# Altium PCB PCB_AVlabs AV-GMK MK I_2_2024-01-18 (1).pcbdoc (part 3 of 5)
Units mil, origin at the board's own origin, x right, y up, seen from the top; angles counter-clockwise.
Board outline 17777.1 x 9140.8 mil, 2 copper layers (Top Layer, Bottom Layer); 156 components, 279 nets, 1257 pads, 596 vias.
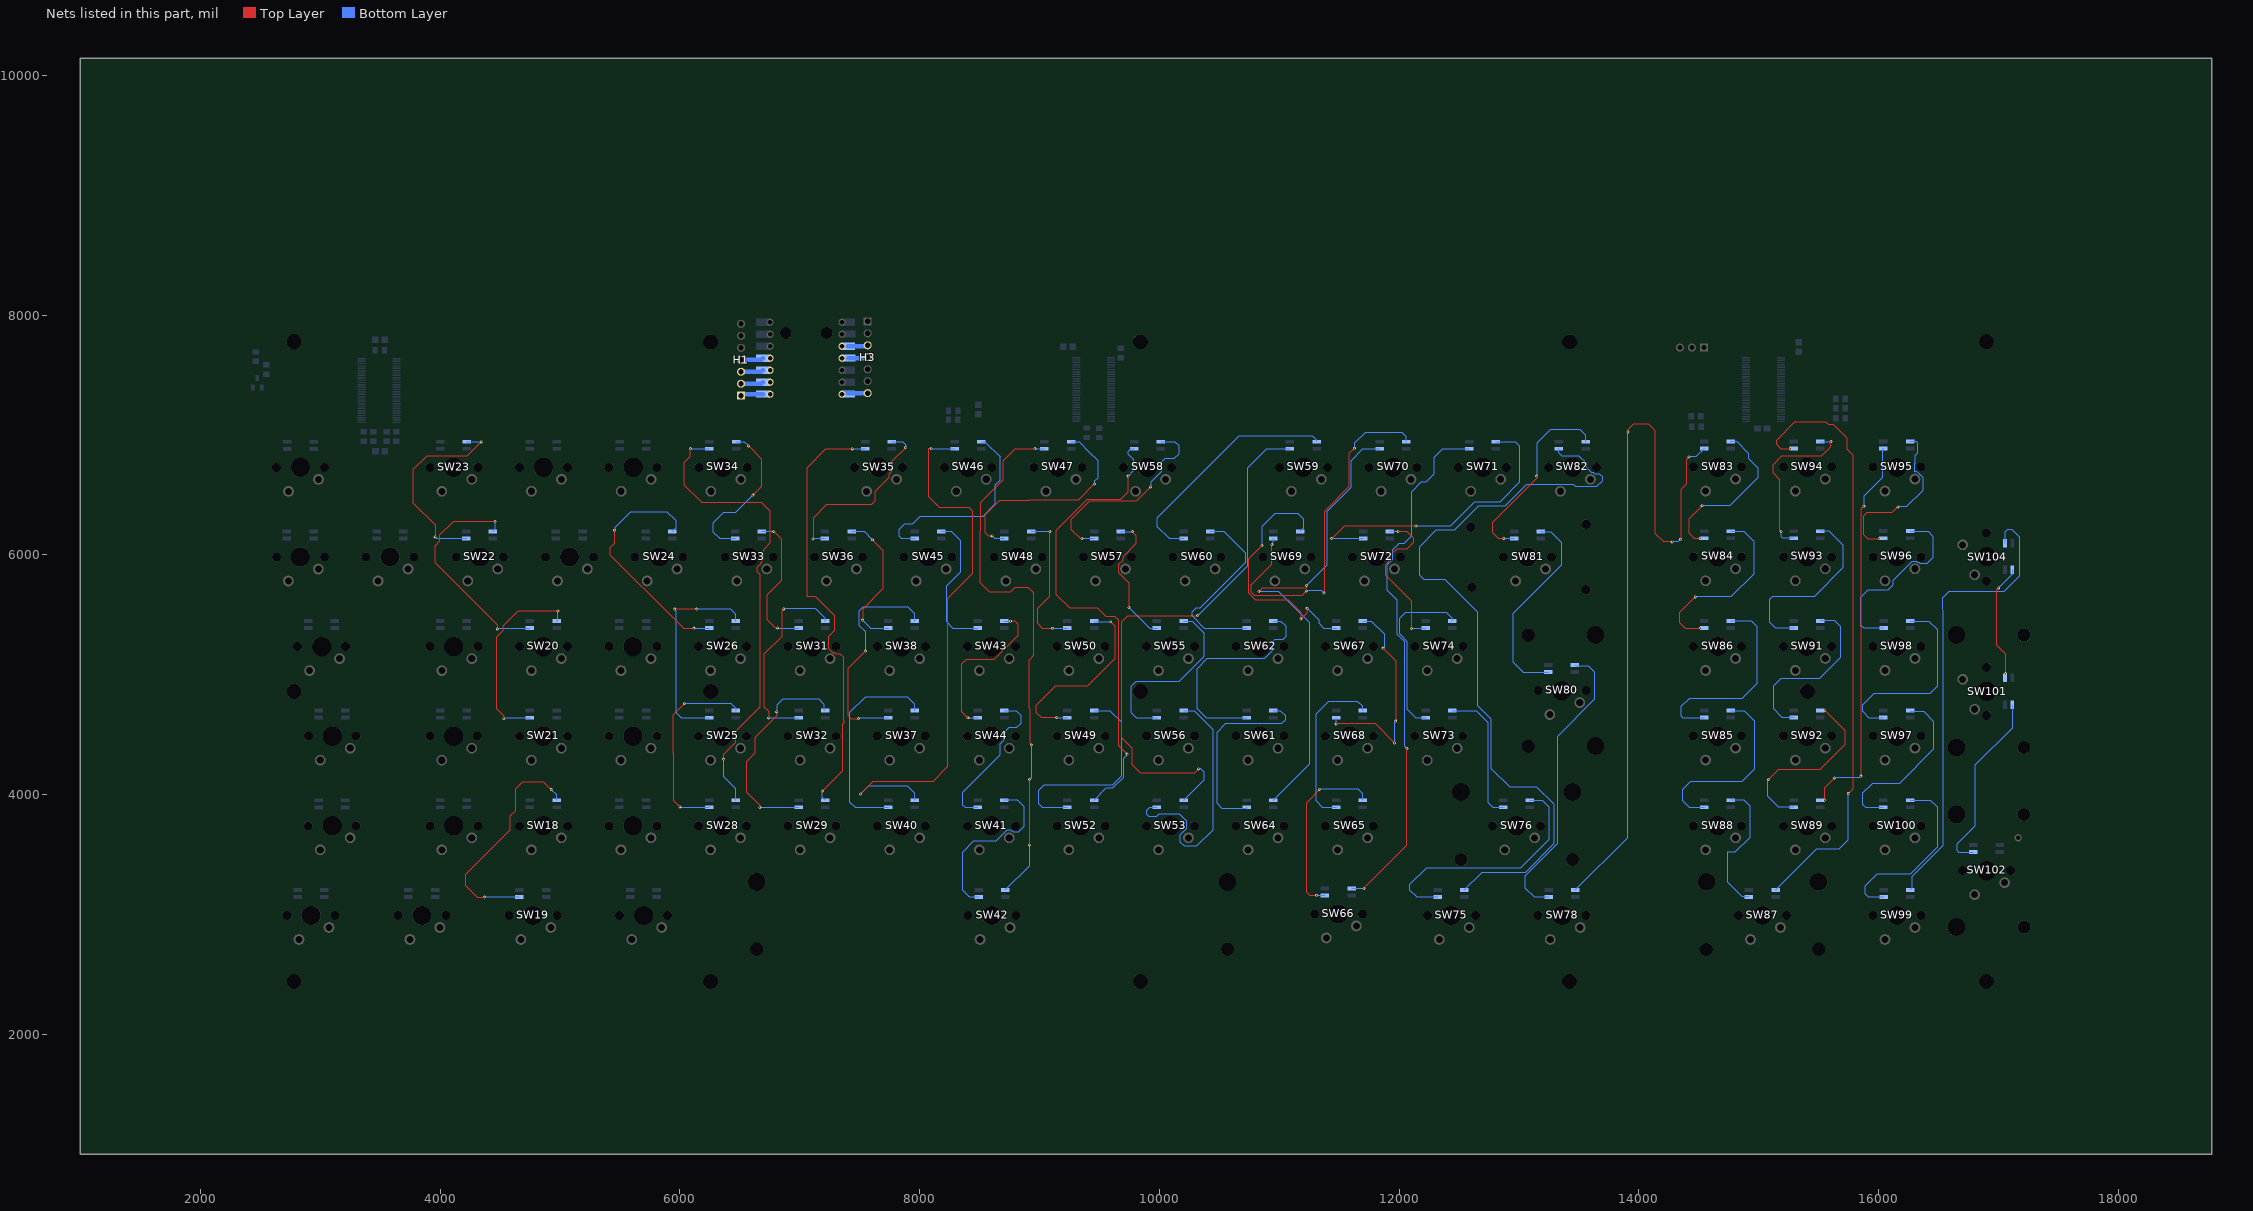
[diagram p3: the nets of this part, all layers, seen from the top]

## Via types
v1: diameter 24.41, hole 12.2, Top Layer to Bottom Layer, tented both sides, 596 vias

## Nets (pads, with @x,y where several pads share a name; then routed paths per layer and width w, separated by ;. In a path a pad name is that pad's centre, name@x,y a point inside that pad or via, vN(x,y) a via of type N, cw(c..) or ccw(c..) an arc to the next point about the centre after c; other vN are vias at no path point) (continued)
SW18_DO: SW18.DO SW19.DI | length 1923.6
  Top Layer w10: v1(4369.6,3144.4) 4311.6,3144.4 4210.6,3245.4 4210.6,3331.4 4583.6,3704.4 4583.6,3818.4 4625.6,3860.4 4625.6,4043.4 4686.6,4104.4 4864.3,4104.4 v1(4927.5,4041.2)
  Bottom Layer w10: v1(4369.6,3144.4) 4370.99,3145.79 SW19.DI@4661.84,3145.76 ; v1(4927.5,4041.2) 4971.95,3996.75 SW18.DO@4971.98,3952.82
SW20_DI: SW20.DI SW22.DO | length 1887.6
  Top Layer w10: v1(4458.5,6277.2) 4110.5,6277.2 3995.5,6162.2 3995.5,6112.2 3954.5,6071.2 3955.5,6070.2 3955.5,5939.2 4477.5,5417.2 v1(4477.5,5382.2)
  Bottom Layer w10: SW22.DO@4441.38,6195.42 4458.5,6212.6 v1(4458.5,6277.2) ; v1(4477.5,5382.2) 4483.59,5388.29 SW20.DI@4749.54,5388.26
SW20_DO: SW20.DO SW21.DI | length 1643.3
  Top Layer w10: v1(4531.5,4632.2) 4531.5,4656.2 4469.5,4718.2 4469.5,5314.2 4521.5,5366.2 4521.5,5405.2 4647.5,5531.2 v1(4982.5,5531.2)
  Bottom Layer w10: v1(4531.5,4632.2) 4540.29,4640.99 SW21.DI@4749.54,4640.96 ; SW20.DO@4971.95,5447.35 4982.5,5457.9 v1(4982.5,5531.2)
SW22_DI: SW22.DI SW23.DO | length 1687.2
  Top Layer w10: v1(3958.5,6149.2) 3958.5,6250.2 3774.5,6434.2 3774.5,6710.2 3887.5,6823.2 4224.5,6823.2 v1(4343.5,6942.2)
  Bottom Layer w10: v1(3958.5,6149.2) 3971.31,6136.39 SW22.DI@4218.94,6136.36 ; SW23.DO@4224.78,6943.22 4225.8,6942.2 v1(4343.5,6942.2)
SW24_DO: SW24.DO SW26.DI | length 2018.6
  Top Layer w10: v1(5456.6,6204.9) 5452.6,6200.9 5452.6,6093.9 5417.6,6058.9 5417.6,6001.9 5962.6,5456.9 6030.8,5388.7 v1(6118.1,5388.7)
  Bottom Layer w10: v1(5456.6,6204.9) 5456.6,6225.9 5587.6,6356.9 5895.6,6356.9 5968.6,6283.9 5968.6,6226.7 SW24.DO@5937.38,6195.42 ; v1(6118.1,5388.7) 6243.6,5388.7 SW26.DI@6244.04,5388.26
SW25_DI: SW25.DI SW26.DO | length 1744.7
  Top Layer w10: v1(5957.6,5546.7) v1(6138.1,5546.7)
  Bottom Layer w10: v1(5957.6,5546.7) 5967.6,5536.7 5967.6,4685.7 6012.31,4640.99 SW25.DI@6244.04,4640.96 ; v1(6138.1,5546.7) 6424.6,5546.7 6467.6,5503.7 6467.6,5448.5 SW26.DO@6466.45,5447.35
SW25_DO: SW25.DO SW28.DI | length 1640.5
  Top Layer w10: v1@6001.6,3897.7 v1(6000.6,3897.7) 5943.6,3954.7 5943.6,4348.7 5942.6,4349.7 5942.6,4663.3 v1(6040.3,4761)
  Bottom Layer w10: v1(6000.6,3897.7) 6004.51,3893.79 SW28.DI@6243.94,3893.76 ; v1(6040.3,4761) 6425.3,4760.4 6466.5,4719.2 6466.5,4700.1 SW25.DO@6469.6,4703.2
SW28_DO: SW28.DO SW34.DI | length 3920.5
  Top Layer w10: v1(6089,6885.3) 6089,6823.2 6037.9,6772.1 6037.9,6582.1 6187.9,6432.1 6682.9,6432.1 6752.9,6362.1 6752.9,6098.6 6698.5,6044.2 6698.5,5961 6673.2,5935.7 6673.2,5923.6 6645.6,5896 6645.6,5856.9 6669.8,5832.7 6670.3,4731.9 6466.3,4527.9 6466.3,4437.3 6364.8,4335.8 v1(6364.8,4295.7)
  Bottom Layer w10: v1(6089,6885.3) 6090.01,6884.29 SW34.DI@6246.34,6884.26 ; v1(6364.8,4295.7) 6364.8,4148.4 6466.35,4046.85 SW28.DO@6466.38,3952.82
SW29_DI: SW29.DI SW32.DO | length 1817.1
  Top Layer w10: v1(6667.7,3892.5) 6667.7,3911.2 6554.4,4024.5 6554.4,4275.1 6625.1,4345.8 6625.1,4473.8 6807.8,4656.5 v1(6807.8,4689.8)
  Bottom Layer w10: v1(6667.7,3892.5) 6989.92,3892.5 SW29.DI@6991.24,3893.76 ; v1(6807.8,4689.8) 6807.8,4744.5 6857.1,4793.8 7161.1,4793.8 7206.4,4748.5 7206.4,4707.2 SW32.DO@7213.58,4700.02
SW29_DO: SW29.DO SW35.DI | length 3655.2
  Top Layer w10: v1(7189.7,4029.8) 7360.1,4200.2 7360.1,4589.5 7376.1,4605.5 7366.3,4615.3 7366.3,5143.9 7338.3,5171.9 7303.3,5171.9 7290.3,5184.9 7276.4,5184.9 7243.3,5218 7243.3,5321.9 7293.3,5371.9 7293.3,5491.9 7135.3,5649.9 7061.3,5649.9 7061.3,6727.9 7217.3,6883.9 v1(7438.3,6883.9)
  Bottom Layer w10: v1(7189.7,4029.8) 7189.7,3976.8 SW29.DO@7213.65,3952.85 ; v1(7438.3,6883.9) SW35.DI@7545.94,6884.06
SW31_DI: SW31.DI SW33.DO | length 1203.2
  Top Layer w10: v1(6782.6,6194.6) 6844.6,6132.6 6844.6,5784.6 6723.6,5663.6 6723.6,5463.6 6796.6,5390.6 v1(6813.6,5390.6)
  Bottom Layer w10: SW33.DO@6685.35,6195.35 6686.1,6194.6 v1(6782.6,6194.6) ; v1(6813.6,5390.6) 6816.01,5388.19 SW31.DI@6991.24,5388.16
SW31_DO: SW31.DO SW32.DI | length 1646.8
  Top Layer w10: v1(6740.4,4638.9) 6740.4,4694.9 6701.7,4733.6 6701.7,5169.5 6848.4,5316.2 6848.4,5529.6 v1(6867,5548.2)
  Bottom Layer w10: v1(6740.4,4638.9) 6742.49,4640.99 SW32.DI@6991.14,4640.96 ; v1(6867,5548.2) 7135,5548.2 7213.6,5469.6 SW31.DO@7213.6,5447.3
SW33_DI: SW33.DI SW34.DO | length 1319.4
  Top Layer w10: v1(6573.8,6908.1) 6683,6798.9 6683,6570.8 v1(6609.4,6497.2)
  Bottom Layer w10: SW33.DI@6462.94,6136.26 6458.82,6132.2 6336.4,6132.2 6279.4,6189.2 6279.4,6267.2 6365.4,6353.2 6465.4,6353.2 v1(6609.4,6497.2) v1@6610.4,6497.2 ; SW34.DO@6468.75,6943.35 6538.55,6943.35 v1(6573.8,6908.1)
SW35_DO: SW35.DO SW36.DI | length 1551
  Top Layer w10: v1(7111,6132.2) 7111,6306.9 7220.3,6416.2 7595,6416.2 7627,6448.2 7627,6525.6 7743,6641.6 7743,6672.3 7769.6,6698.9 7769.6,6781.5 v1(7883,6894.9)
  Bottom Layer w10: v1(7111,6132.2) 7114.99,6136.19 SW36.DI@7210.64,6136.16 ; SW35.DO@7768.4,6943.2 7857.6,6942.9 7883,6917.5 v1(7883,6894.9)
SW36_DO: SW36.DO SW38.DI | length 1218.5
  Top Layer w10: v1(7525.3,5454.9) 7525.3,5547.9 7692.3,5714.9 7692.3,6040 v1(7606.9,6125.4)
  Bottom Layer w10: SW36.DO@7433.05,6195.25 7537.05,6195.25 v1(7606.9,6125.4) ; v1(7525.3,5454.9) 7591.91,5388.29 SW38.DI@7738.44,5388.26
SW37_DI: SW37.DI SW38.DO | length 1867
  Top Layer w10: v1(7489.3,4632.9) 7429.3,4632.9 7401.3,4660.9 7401.3,5050.9 v1(7547.3,5196.9)
  Bottom Layer w10: v1(7489.3,4632.9) 7497.49,4641.09 SW37.DI@7738.34,4641.06 ; v1(7547.3,5196.9) 7547.3,5360.9 7494.3,5413.9 7494.3,5530.9 7525.3,5561.9 7907.3,5561.9 7911.3,5557.9 7960.85,5508.35 SW38.DO@7960.85,5447.35
SW37_DO: SW37.DO SW40.DI | length 1761.2
  Bottom Layer w10: SW40.DI@7738.34,3893.76 7462.41,3893.79 7415.3,3940.9 7415.3,4681.9 7546.3,4812.9 7901.3,4812.9 7960.75,4753.45 SW37.DO@7960.75,4700.15
SW40_DO: SW40.DO SW46.DI | length 4641.3
  Top Layer w10: v1(7507.3,4005.9) 7612.9,4111.5 8112.5,4111.5 8236.6,4235.6 8236.6,5639.3 8442.2,5844.9 8442.2,6365.2 8414.4,6393 8166.2,6393 8076.6,6482.6 8076.6,6887.4 v1(8095.9,6887.4)
  Bottom Layer w10: v1(7507.3,4005.9) 7507.3,4006.9 7571.3,4070.9 7902.3,4070.9 7960.75,4012.45 SW40.DO@7960.75,3952.85 ; v1(8095.9,6887.4) 8098.91,6884.39 SW46.DI@8293.64,6884.36
SW41_DI: SW41.DI SW44.DO | length 1274
  Bottom Layer w10: SW41.DI@8485.64,3893.76 8379.41,3893.79 8356.5,3916.7 8356.5,4013.7 8669.5,4326.7 8669.5,4420.7 8705.5,4456.7 8705.5,4505.7 8714.5,4514.7 8714.5,4526.7 8743.5,4555.7 8807.4,4555.7 8843.5,4591.8 8843.5,4661.7 8806.5,4698.7 8709.5,4698.7 SW44.DO@8708.18,4700.02
SW41_DO: SW41.DO SW42.DI | length 1447.8
  Bottom Layer w10: SW42.DI@8492.24,3145.76 8416.31,3145.79 8354,3208.1 8354,3514.4 8449.7,3610.1 8635.9,3610.1 8727.9,3702.1 8760.4,3702.1 8769.9,3692.6 8778.8,3692.6 8786.8,3684.6 8822.3,3684.6 8869.9,3732.2 8869.9,3903.4 8816.4,3956.9 8712.1,3956.9 SW41.DO@8708.05,3952.85
SW42_DO: SW42.DO SW47.DI | length 4590.5
  Top Layer w10: v1(8917.2,3580) v1(8917.2,4124.4) ; v1(8934.4,4413.2) 8924.4,4423.2 8924.4,4712.2 8913.4,4723.2 8913.4,5122.2 8952.4,5161.2 8952.4,5211.2 8950.2,5213.4 8950.2,5682.2 8905.5,5726.9 8794.9,5726.9 8755.4,5687.4 8584.4,5687.4 8505.4,5766.4 8505.4,6195.3 8510.7,6200.6 8510.7,6440.1 8697.6,6627 8697.6,6784.8 8798,6885.2 v1(8961.2,6885.2)
  Bottom Layer w10: SW42.DO@8714.65,3204.85 8917.2,3407.4 v1(8917.2,3580) ; v1(8917.2,4124.4) 8934.4,4141.6 v1(8934.4,4413.2) ; v1(8961.2,6885.2) 9040.7,6885.2 SW47.DI@9041.64,6884.26
SW43_DI: SW43.DI SW45.DO | length 1202.5
  Bottom Layer w10: SW45.DO@8181.25,6195.35 8265.75,6195.35 8339.7,6121.4 8339.7,5855.7 8221.2,5737.2 8221.2,5445.1 8278.01,5388.29 SW43.DI@8485.74,5388.26
SW43_DO: SW43.DO SW44.DI | length 1341.3
  Top Layer w10: v1(8402.6,4640.8) 8352.2,4691.2 8352.2,5090.5 8391.4,5129.7 8624.7,5129.7 8822.5,5327.5 8822.5,5421.7 8798.5,5445.7 v1(8758.3,5445.7)
  Bottom Layer w10: v1(8402.6,4640.8) SW44.DI@8485.74,4640.96 ; SW43.DO@8708.15,5447.35 8709.8,5445.7 v1(8758.3,5445.7)
SW45_DI: SW45.DI SW46.DO | length 1704
  Bottom Layer w10: SW45.DI@7958.84,6136.26 7848.31,6136.29 7825,6159.6 7825,6207.7 7873.2,6255.9 7938.1,6255.9 8001,6318.8 8525,6318.8 8626.9,6420.7 8626.9,6578.1 8667.6,6618.8 8667.6,6813.3 8671.3,6817 8544.85,6943.45 SW46.DO@8516.05,6943.45
SW47_DO: SW47.DO SW48.DI | length 1845.6
  Top Layer w10: v1(8604.9,6157.6) 8572.9,6157.6 8543.9,6186.6 8543.9,6331.6 8664.9,6452.6 8908.9,6452.6 8909.9,6453.6 9321.9,6453.6 v1(9458.9,6590.6)
  Bottom Layer w10: v1(8604.9,6157.6) 8626.21,6136.29 SW48.DI@8707.04,6136.26 ; SW47.DO@9264.05,6943.35 9330.15,6943.35 9412.3,6861.2 9485.7,6787.8 9485.7,6638.6 9458.9,6611.8 v1(9458.9,6590.6)
SW48_DO: SW48.DO SW50.DI | length 1236.8
  Top Layer w10: v1(9086.9,6195.6) 9079.9,6188.6 9079.9,5651.6 8979.9,5551.6 8979.9,5432.6 9024.9,5387.6 v1(9109.9,5387.6)
  Bottom Layer w10: SW48.DO@8929.45,6195.35 8929.7,6195.6 v1(9086.9,6195.6) ; v1(9109.9,5387.6) 9232.22,5387.6 SW50.DI@9232.94,5388.26
SW49_DI: SW49.DI SW50.DO | length 1624
  Top Layer w10: v1(9142.2,4643.4) 9012.8,4643.4 8967.5,4688.7 8967.5,4739.4 9130.2,4902.1 9396.9,4902.1 9628.9,5134.1 9628.9,5407.1 v1(9594.3,5441.7)
  Bottom Layer w10: v1(9142.2,4643.4) 9144.61,4640.99 SW49.DI@9232.94,4640.96 ; SW50.DO@9455.35,5447.35 9461,5441.7 v1(9594.3,5441.7)
SW49_DO: SW49.DO SW52.DI | length 1822
  Bottom Layer w10: SW52.DI@9232.94,3893.76 9025.11,3893.79 8990.2,3928.7 8990.2,4032.7 9034.2,4076.7 9606.2,4076.7 9682.2,4152.7 9682.2,4606.1 9588.25,4700.05 SW49.DO@9455.38,4700.02
SW52_DO: SW52.DO SW58.DI | length 3991.8
  Top Layer w10: v1(9731.2,4338) 9662,4407.2 9662,5452.7 9633,5481.7 9559,5481.7 9487.6,5553.1 9254.7,5553.1 9139.9,5667.9 9139.9,6204.9 9399.2,6464.2 9678.8,6464.2 9740.1,6525.5 v1(9740.1,6655.8)
  Bottom Layer w10: SW52.DO@9455.38,3952.82 9558.1,4055.6 9613,4055.6 9702,4144.6 9702,4301.4 9731.2,4330.6 v1(9731.2,4338) ; v1(9740.1,6655.8) 9787.5,6703.2 9787.5,6791.7 9740.4,6838.8 9740.4,6864.6 9760.1,6884.3 SW58.DI@9789.64,6884.26
SW53_DI: SW53.DI SW56.DO | length 2198.7
  Bottom Layer w10: SW53.DI@9980.24,3893.76 9918.59,3893.79 9893.7,3868.9 9893.7,3836.8 9916.3,3814.2 9972.3,3814.2 9995,3836.9 10171,3836.9 10229.7,3778.2 10229.7,3719.5 10173.7,3663.5 10173.7,3603.5 10209.7,3567.5 10309.7,3567.5 10445.7,3703.5 10445.7,4546.2 10291.75,4700.15 SW56.DO@10202.65,4700.15
SW53_DO: SW53.DO SW59.DI | length 4672.4
  Top Layer w10: v1(10319.1,5492.1) 9737.5,5492.1 9684.9,5439.5 9684.9,4473.7 9771.8,4386.8 9771.8,4247.3 9842.8,4176.3 10290.4,4176.3 v1(10327.7,4213.6)
  Bottom Layer w10: SW53.DO@10202.65,3952.85 10375.1,4125.3 10375.1,4184.6 10346.1,4213.6 v1(10327.7,4213.6) ; v1(10319.1,5492.1) 10735.3,5908.3 10735.3,6725.1 10894.5,6884.3 SW59.DI@11088.84,6884.26
SW55_DI: SW55.DI SW57.DO | length 1146.1
  Top Layer w10: v1(9746.1,5560.7) 9746.1,5766 9658.1,5854 9658.1,5915.3 9692.8,5950 9692.8,5980.7 9804.8,6092.7 9804.8,6163.5 v1(9774.9,6193.4)
  Bottom Layer w10: SW57.DO@9677.45,6195.35 9679.4,6193.4 v1(9774.9,6193.4) ; v1(9746.1,5560.7) 9918.51,5388.29 SW55.DI@9980.24,5388.26
SW55_DO: SW55.DO SW56.DI | length 1573.4
  Bottom Layer w10: SW56.DI@9980.24,4641.06 9808.1,4641.1 9761.7,4687.5 9761.7,4899.6 9803.5,4941.4 10163.5,4941.4 10372.3,5150.2 10372.3,5348.9 10273.8,5447.4 SW55.DO@10202.6,5447.4
SW57_DI: SW57.DI SW58.DO | length 1735.4
  Top Layer w10: v1(9354.2,6136.2) 9338.2,6136.2 9260.8,6213.6 9260.8,6292.2 9416.8,6448.2 9808.8,6448.2 v1(9927.5,6566.9)
  Bottom Layer w10: v1(9354.2,6136.2) SW57.DI@9455.04,6136.26 ; v1(9927.5,6566.9) 9927.5,6604.9 10016.7,6694.1 10016.7,6769.9 10046.7,6799.9 10121.7,6799.9 10162.4,6840.6 10162.4,6912 10130.3,6944.1 SW58.DO@10012,6943.3
SW59_DO: SW59.DO SW60.DI | length 1975.7
  Bottom Layer w10: SW60.DI@10203.04,6136.26 10081,6136.3 9978.2,6239.1 9978.2,6303.7 10663.5,6989 11278.9,6989 11311.3,6956.6 SW59.DO@11311.28,6943.32
SW60_DO: SW60.DO SW62.DI | length 1592.4
  Bottom Layer w10: SW60.DO@10425.45,6195.35 10538.45,6195.35 10714.9,6018.9 10714.9,5932.1 10336.2,5553.4 10301.8,5553.4 10270.3,5521.9 10270.3,5494.4 10376.41,5388.29 SW62.DI@10727.44,5388.26
SW61_DI: SW61.DI SW62.DO | length 1883.2
  Bottom Layer w10: SW61.DI@10727.44,4641.06 10391.81,4641.09 10311.8,4721.1 10311.8,5047 10397,5132.2 10876.7,5132.2 10943.3,5198.8 10943.3,5271.1 10963.6,5291.4 11030.3,5291.4 11054.4,5315.5 11054.4,5406.3 11013.35,5447.35 SW62.DO@10949.85,5447.35
SW61_DO: SW61.DO SW64.DI | length 1636.4
  Bottom Layer w10: SW64.DI@10727.44,3893.76 10727.4,3881.7 10721.1,3888 10521.6,3888 10477.6,3932 10477.6,4517.3 10549.6,4589.3 11016.3,4589.3 11048.3,4621.3 11048.3,4661.3 11009.5,4700.2 SW61.DO@10949.9,4700.2
SW64_DO: SW64.DO SW70.DI | length 4045.6
  Top Layer w10: v1(10829.9,5692.2) 10862.4,5724.7 11227.8,5724.7 v1(11227.8,5745.4)
  Bottom Layer w10: v1(10829.9,5692.2) 10997,5692.2 11255.9,5433.3 11255.9,4258.9 SW64.DO@10949.9,3952.9 ; v1(11227.8,5745.4) 11400.3,5917.9 11400.3,6363.7 11598.5,6561.9 11598.5,6785.9 11696.89,6884.29 SW70.DI@11836.84,6884.26
SW65_DI: SW65.DI SW68.DO | length 1403.6
  Bottom Layer w10: SW65.DI@11474.64,3893.76 11360.71,3893.79 11302.6,3951.9 11302.6,4669.1 11409.3,4775.8 11656,4775.8 11697.05,4734.75 SW68.DO@11697.05,4700.05
SW65_DO: SW65.DO SW66.DI | length 1498.4
  Top Layer w10: v1(11311.8,3160.1) 11254.5,3160.1 11223.8,3190.8 11223.8,3929.5 v1(11337.1,4042.8)
  Bottom Layer w10: v1(11311.8,3160.1) 11313.21,3158.69 SW66.DI@11380.44,3158.66 ; v1(11337.1,4042.8) 11662.4,4042.8 11665.1,4040.1 11697.05,4008.15 SW65.DO@11697.05,3952.85
SW66_DO: SW66.DO SW71.DI | length 4447.4
  Top Layer w10: v1(11705.5,3217.4) 12065.4,3577.3 v1(12065.4,4384.1)
  Bottom Layer w10: SW66.DO@11602.8,3217.8 v1(11705.5,3217.4) ; v1(12065.4,4384.1) 12047,4402.5 12047,5273.6 11983.8,5336.8 11983.8,5621 11899.6,5705.2 11899.6,5915.7 11947,5963.1 11947,6042 11999.7,6094.7 12041.7,6094.7 12104.9,6157.9 12104.9,6526.3 12186.4,6607.8 12225.9,6607.8 12294.4,6676.3 12294.4,6813.1 12365.69,6884.39 SW71.DI@12584.84,6884.36
SW67_DI: SW67.DI SW69.DO | length 2126.8
  Top Layer w10: v1(10855.3,6077.2) 10739.5,5961.4 10739.5,5685.1 10800,5624.6 11076.3,5624.6 11180.6,5520.3 v1(11180.6,5463.7) 11232.6,5515.7 v1(11232.6,5554)
  Bottom Layer w10: v1(10855.3,6077.2) 10855.3,6235.1 10963.2,6343 11158,6343 11202.7,6298.3 11202.7,6224.6 SW69.DO@11173.45,6195.35 ; v1(11232.6,5554) 11329.4,5457.2 11329.4,5432.1 11373.21,5388.29 SW67.DI@11474.64,5388.26
SW67_DO: SW67.DO SW68.DI | length 1790
  Top Layer w10: v1(11474.6,4589.1) 11804,4589.1 v1(11961.3,4431.8) ; v1(11866.6,5221.1) 11972,5115.7 v1(11972,4613.1)
  Bottom Layer w10: v1(11474.6,4589.1) SW68.DI@11474.64,4640.96 ; SW67.DO@11697,5447.4 11767,5447.4 11874.6,5339.8 11874.6,5221.1 v1(11866.6,5221.1) ; v1(11961.3,4431.8) 11961.3,4602.4 v1(11972,4613.1)
SW69_DI: SW69.DI SW70.DO | length 3044.6
  Top Layer w10: v1(10938.7,6087.4) 10938.7,5922.1 10768,5751.4 10768,5687.4 10797.4,5658 11186,5658 v1(11227.7,5699.7) ; v1(11373.4,5680.1) 11373.4,6358.8 11581.4,6566.8 11581.4,6843.4 v1(11627,6889)
  Bottom Layer w10: v1(10938.7,6087.4) 10951.01,6099.71 SW69.DI@10951.04,6136.26 ; v1(11227.7,5699.7) 11353.8,5699.7 v1(11373.4,5680.1) ; v1(11627,6889) 11627,6928.4 11716.5,7017.9 12024.4,7017.9 12059.3,6983.1 SW70.DO@12059.28,6943.32
SW71_DO: SW71.DO SW72.DI | length 2537.6
  Top Layer w10: v1(11436.3,6135) 11541.5,6240.2 v1(12138.9,6240.2)
  Bottom Layer w10: v1(11436.3,6135) 11437.59,6136.29 SW72.DI@11699.04,6136.26 ; v1(12138.9,6240.2) 12425.8,6240.2 12625.8,6440.2 12838.9,6440.2 13002.1,6603.4 13002.1,6908.7 12967.9,6942.9 12807.8,6942.9 SW71.DO@12807.25,6943.45
SW72_DO: SW72.DO SW74.DI | length 1330.2
  Top Layer w10: v1(11992.1,6195.1) 11993,6196 12064.4,6196 12118.4,6142 12118.4,6102 12062.4,6046 11979.4,6046 11923.4,5990 11923.4,5962 11905.4,5944 11905.4,5936 11895.4,5926 11895.4,5925 11887.4,5917 11887.4,5915 11885.4,5913 11885.4,5834 12101.4,5618 v1(12101.4,5387)
  Bottom Layer w10: SW72.DO@11921.5,6195.4 v1(11992.1,6195.1) ; v1(12101.4,5387) 12220.52,5387 SW74.DI@12221.84,5388.26
SW73_DI: SW73.DI SW74.DO | length 1470.7
  Bottom Layer w10: SW73.DI@12221.94,4640.96 12139.5,4641 12065.5,4715 12065.5,5279 12000.5,5344 12000.5,5465 12051.5,5516 12398.5,5516 12444.3,5470.3 SW74.DO@12444.3,5447.4
SW73_DO: SW73.DO SW76.DI | length 1151.8
  Bottom Layer w10: SW73.DO@12444.38,4700.02 12642.25,4700.05 12740.5,4601.8 12737.8,4599.1 12737.8,3936 12780.01,3893.79 SW76.DI@12868.34,3893.76
SW75_DI: SW75.DI SW76.DO | length 2076.1
  Bottom Layer w10: SW75.DI@12322.64,3145.76 12145.6,3145.8 12085.7,3205.7 12085.7,3246.5 12226.4,3387.2 13011.6,3387.2 13248.6,3624.2 13248.6,3898.3 13194.9,3952 SW76.DO@13090.7,3952.9
SW75_DO: SW75.DO SW82.DI | length 6389.7
  Bottom Layer w10: SW75.DO@12545.1,3204.9 12692.7,3352.5 13054.8,3352.5 13294.8,3592.5 13294.8,3917.5 13149.8,4062.5 12924.8,4062.5 12769.8,4217.5 12769.8,4627.5 12654.8,4742.5 12654.8,5522.5 12384.8,5792.5 12209.8,5792.5 12171.1,5831.2 12171.1,6068.3 12310,6207.2 12461.8,6207.2 12663.6,6409 12884,6409 13063.6,6588.6 13452.5,6588.6 13471,6570.1 13648.8,6570.1 13697,6618.3 13697,6651.6 13674.8,6673.8 13635.9,6673.8 13624.8,6684.9 13605.5,6684.9 13565.5,6724.9 13565.5,6762.7 13504.4,6823.8 13361.1,6823.8 13333,6851.9 SW82.DI@13333.04,6884.26
SW78_DI: SW78.DI SW80.DO | length 2458.8
  Bottom Layer w10: SW78.DI@13247.84,3145.76 13125.21,3145.79 13049.7,3221.3 13049.7,3319.5 13320,3589.8 13320,4484.2 13629.3,4793.5 13629.3,5025 13579.3,5075 13472.5,5075 SW80.DO@13466.75,5080.75
SW78_DO: SW78.DO SW83.DI | length 6268.8
  Top Layer w10: v1(13907.5,7024.3) 13907.5,7044.7 13952.6,7089.8 14081.9,7089.8 14137.2,7034.5 14137.2,6176.7 14205.8,6108.1 v1(14277.3,6108.1) ; v1(14347.3,6129.6) 14347.3,6541.6 14393.6,6587.9 14393.6,6793.4 v1(14417.7,6817.5)
  Bottom Layer w10: SW78.DO@13470.3,3204.9 13907.1,3641.7 v1@13907.1,7024.2 ; v1(14277.3,6108.1) 14325.8,6108.1 v1(14347.3,6129.6) ; v1(14417.7,6817.5) 14475.62,6817.5 SW83.DI@14544.04,6885.86
SW80_DI: SW80.DI SW81.DO | length 1705.8
  Bottom Layer w10: SW81.DO@13181.35,6195.35 13183.2,6193.5 13266.3,6193.5 13353.4,6106.4 13353.4,5912.1 12949.7,5508.4 12949.7,5106.5 13034.51,5021.69 SW80.DI@13244.34,5021.66
SW81_DI: SW81.DI SW82.DO | length 1623.9
  Top Layer w10: v1(12872.3,6137.1) 12828.4,6137.1 12777.7,6187.8 12777.7,6267.8 13146.9,6637 v1(13146.9,6656.9)
  Bottom Layer w10: v1(12872.3,6137.1) SW81.DI@12958.94,6136.26 ; v1(13146.9,6656.9) 13146.9,6928.8 13146.8,6928.9 13260,7042.1 13509.9,7042.1 13555.45,6996.55 SW82.DO@13555.45,6943.35
SW83_DO: SW83.DO SW84.DI | length 1372.3
  Top Layer w10: v1(14510.5,6137.3) 14462.5,6137.3 14414.5,6185.3 14414.5,6297.3 v1(14526.5,6409.3)
  Bottom Layer w10: v1(14526.5,6409.3) 14758.5,6409.3 14991.5,6642.3 14991.5,6724.3 14911.5,6804.3 14911.5,6848.3 14814.5,6945.3 14766.8,6945.3 SW83.DO@14766.45,6944.95
SW84_DO: SW84.DO SW86.DI | length 1532.8
  Top Layer w10: v1(14469.9,5649.6) 14336.5,5516.2 14336.5,5436.7 14384.7,5388.5 v1(14514.3,5388.5)
  Bottom Layer w10: v1(14469.9,5649.6) 14768,5649.6 14956.9,5838.5 14956.9,6116.2 14951.3,6121.8 14876.15,6196.95 SW84.DO@14766.45,6196.95
SW85_DI: SW85.DI SW86.DO | length 1700.4
  Bottom Layer w10: SW85.DI@14544.04,4641.76 14364.01,4641.79 14349.7,4656.1 14349.7,4732.5 14418.1,4800.9 14857.7,4800.9 14981.3,4924.5 14981.3,5403.4 14935.75,5448.95 SW86.DO@14766.45,5448.95
SW85_DO: SW85.DO SW88.DI | length 1601.7
  Bottom Layer w10: SW88.DI@14544.04,3893.76 14420.31,3893.79 14361.9,3952.2 14361.9,4039.2 14428.6,4105.9 14856.4,4105.9 14963.8,4213.3 14963.8,4614.6 14877.55,4700.85 SW85.DO@14766.45,4700.85
SW87_DI: SW87.DI SW88.DO | length 1156.7
  Bottom Layer w10: SW88.DO@14766.45,3952.85 14876.55,3952.85 14927,3902.4 14927,3645.1 14804.7,3522.8 14741.8,3522.8 14741.8,3267.2 14863.21,3145.79 SW87.DI@14918.04,3145.76
SW87_DO: SW87.DO SW94.DI | length 5037.8
  Top Layer w10: v1(15262.7,6885.3) 15183.1,6885.3 15144.2,6924.2 15144.2,6952 15296,7103.8 15563.3,7103.8 15583.8,7083.3 15624.8,7083.3 15737.8,6970.3 15737.8,6879.4 15786.8,6830.4 15786.8,4048.4 v1(15746,4007.6)
  Bottom Layer w10: SW87.DO@15140.45,3204.85 15483.9,3548.3 15671.9,3548.3 15746,3622.4 v1(15746,4007.6)
SW89_DI: SW89.DI SW92.DO | length 1511.3
  Top Layer w10: v1(15081.4,4126.7) 15162.8,4208.1 15508.4,4208.1 15716.4,4416.1 15716.4,4534.5 v1(15548.6,4702.3)
  Bottom Layer w10: v1(15081.4,4126.7) 15076.2,4126.7 15076.2,3984.6 15167,3893.8 SW89.DI@15292.04,3893.76
SW89_DO: SW89.DO SW95.DI | length 3255.6
  Top Layer w10: v1(15547.9,3953.6) 15547.9,4054.8 v1(15632.8,4139.7) ; v1(15850.8,4153.7) 15850.8,6378.7 v1(15876.8,6404.7)
  Bottom Layer w10: v1(15632.8,4139.7) 15836.8,4139.7 v1(15850.8,4153.7) ; v1(15876.8,6404.7) 15876.8,6487.7 16030.8,6641.7 16030.8,6876.68 SW95.DI@16040.04,6885.86
SW91_DI: SW91.DI SW93.DO | length 1564.1
  Bottom Layer w10: SW91.DI@15292.04,5389.76 15288.4,5386.2 15140.6,5386.2 15090.6,5436.2 15090.6,5630.2 15115.6,5655.2 15464.8,5655.2 15703.7,5894.1 15703.7,6081 15587.8,6196.9 SW93.DO@15514.5,6196.9
SW91_DO: SW91.DO SW92.DI | length 1492.8
  Bottom Layer w10: SW92.DI@15292.04,4641.76 15197.31,4641.79 15124.6,4714.5 15124.6,4909.2 15185.2,4969.8 15508.9,4969.8 15682.5,5143.4 15682.5,5401.3 15634.95,5448.85 SW91.DO@15514.45,5448.85
SW93_DI: SW93.DI SW94.DO | length 1413.8
  Top Layer w10: v1(15185.9,6195) 15174.1,6206.8 15174.1,6627.1 15118.5,6682.7 15118.5,6753 15192.6,6827.1 15525.9,6827.1 15601.8,6903 v1(15601.8,6943.8)
  Bottom Layer w10: v1(15185.9,6195) 15185.9,6153.9 15201.4,6138.4 15291.6,6138.4 SW93.DI@15292.14,6137.86 ; SW94.DO@15514.55,6944.95 15515.7,6943.8 v1(15601.8,6943.8)
SW95_DO: SW95.DO SW96.DI | length 1398.1
  Top Layer w10: v1(16005.7,6135) 15907.1,6135 15869.3,6172.8 15869.3,6322.1 15898.6,6351.4 16110.7,6351.4 v1(16159.3,6400)
  Bottom Layer w10: v1(16159.3,6400) 16230.8,6400 16366.5,6535.7 16366.5,6647.1 16329.3,6684.3 16315,6698.6 16297.9,6698.6 16297.9,6762.9 16300,6765 16300,6827.9 16320.7,6848.6 16320.7,6936.5 16311.5,6945.7 16263.2,6945.7 SW95.DO@16262.45,6944.95
SW96_DO: SW96.DO SW98.DI | length 1595.4
  Bottom Layer w10: SW98.DI@16040.14,5389.86 15875.2,5389.9 15846.5,5418.6 15846.5,5640 15909.3,5702.8 16075.7,5702.8 16118.6,5745.7 16118.6,5785 16275.7,5942.1 16316.4,5942.1 16322.8,5935.7 16339.3,5935.7 16348.6,5926.4 16402.9,5926.4 16452.9,5976.4 16452.9,6155 16411.5,6197.1 SW96.DO@16262.4,6197.1
SW97_DI: SW97.DI SW98.DO | length 1665.4
  Bottom Layer w10: SW97.DI@16040.04,4641.86 15918.11,4641.89 15862.2,4697.8 15862.2,4744.3 15960,4842.1 16424.3,4842.1 16486.5,4904.3 16486.5,5378.5 16419.3,5445.7 16265.8,5445.7 SW98.DO@16262.55,5448.95
SW97_DO: SW97.DO SW100.DI | length 1488
  Bottom Layer w10: SW100.DI@16040.04,3893.76 15890.01,3893.79 15862.9,3920.9 15862.9,4009.8 15944.4,4091.3 16170.3,4091.3 16455.5,4376.5 16455.5,4613.5 16374,4695 16268.4,4695 SW97.DO@16262.45,4700.95
SW99_DI: SW99.DI SW100.DO | length 1555.1
  Bottom Layer w10: SW99.DI@16040.24,3145.76 15914.21,3145.79 15883.4,3176.6 15883.4,3234.6 15985.4,3336.6 16263.4,3336.6 16489.4,3562.6 16489.4,3896.6 16431.4,3954.6 16264.2,3954.6 SW100.DO@16262.45,3952.85
SW99_DO: SW99.DO SW104.DI | length 3847.2
  Bottom Layer w10: SW99.DO@16262.65,3204.85 16277.4,3219.6 16277.4,3315.6 16535.4,3573.6 16535.4,5539.3 16530.4,5544.3 16530.4,5637.6 16583.4,5690.6 17041.4,5690.6 17173.4,5822.6 17173.4,6151.6 17110.4,6214.6 17076.4,6214.6 17054.99,6193.19 SW104.DI@17054.96,6095.76
SW101_DI: SW101.DI SW104.DO | length 949.8
  Top Layer w10: v1(17001.4,5724.6) 16981.4,5704.6 16981.4,5248.6 17056.4,5173.6 v1(17056.4,5009.6)
  Bottom Layer w10: v1(17001.4,5724.6) 17114.05,5837.25 SW104.DO@17114.05,5873.35
SW101_DO: SW101.DO SW102.DI | length 1548.6
  Bottom Layer w10: SW102.DI@16788.14,3519.76 16669.2,3519.8 16652.4,3536.6 16652.4,3587.6 16800.4,3735.6 16800.4,4242.6 17112.4,4554.6 17112.4,4749.7 SW101.DO@17114.02,4751.32
U3_3: H3.3 pad.3 | length 167
  Bottom Layer w39.37: pad.3@7403.44,7739.56 7558.97,7739.56 H3.3@7567.1,7747.7
U3_4: H3.4 pad.4 | length 164.8
  Bottom Layer w39.37: pad.4@7405.44,7640.23 7559.64,7640.23 H3.4@7567.1,7647.7
U3_7: H3.7 pad.7 | length 217
  Bottom Layer w39.37: pad.7@7353.44,7339.56 7361.57,7347.69 H3.7@7567.1,7347.7
U3_8: H1.1 pad.8 | length 187.9
  Bottom Layer w39.37: H1.1@6510.8,7326.8 6523.56,7339.56 pad.8@6693.44,7339.56
U3_9: H1.2 pad.9 | length 187.9
  Bottom Layer w39.37: H1.2@6510.8,7426.8 6680.69,7426.81 pad.9@6693.44,7439.56
U3_10: H1.3 pad.10 | length 187.9
  Bottom Layer w39.37: H1.3@6510.8,7526.8 6680.69,7526.81 pad.10@6693.44,7539.56
U3_11: H1.4 pad.11 | length 187.9
  Bottom Layer w39.37: H1.4@6510.8,7626.8 6680.69,7626.81 pad.11@6693.44,7639.56